# EAGLE board logic_vB (EAGLE 6.4)
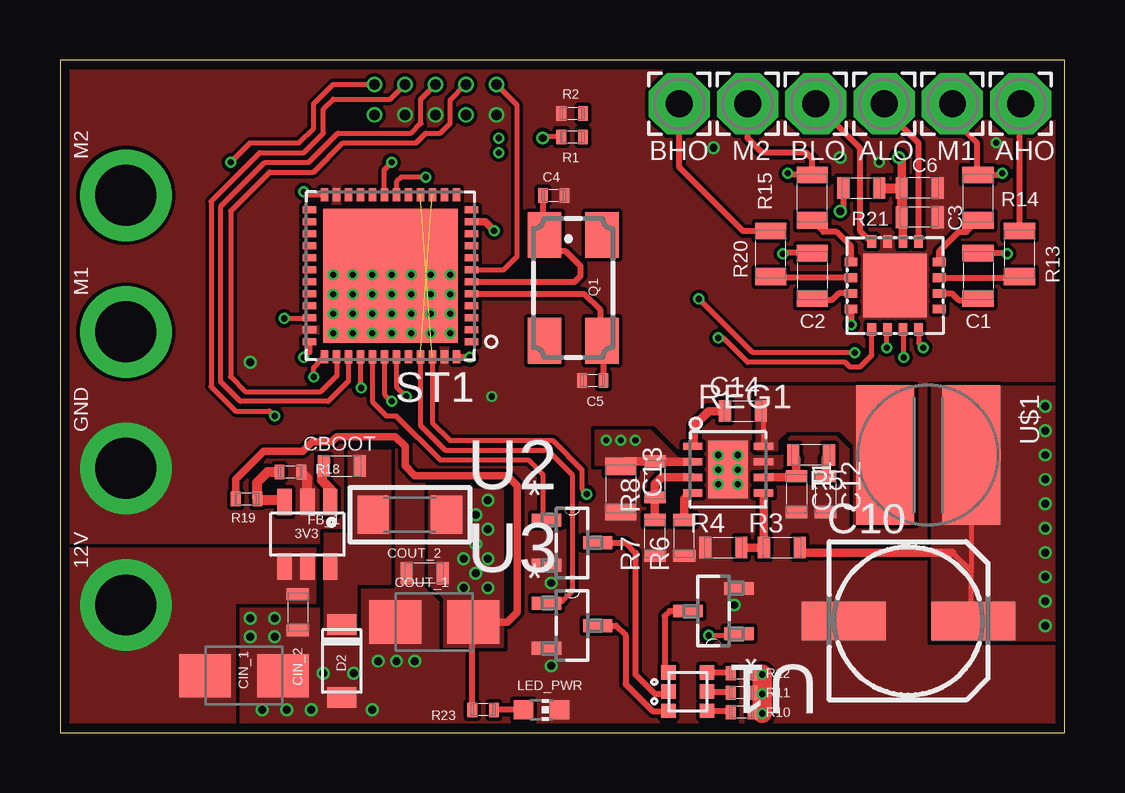
[diagram p0: board, top side]
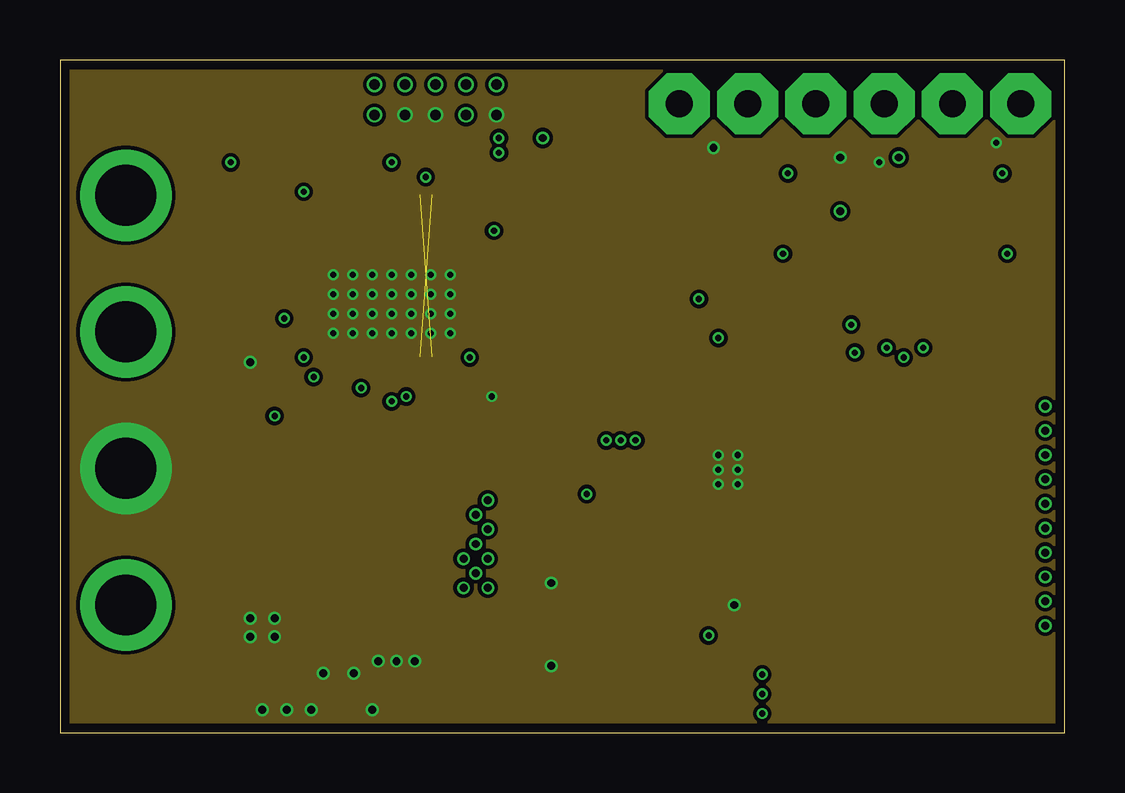
[diagram p1: board, inner layer Route2]
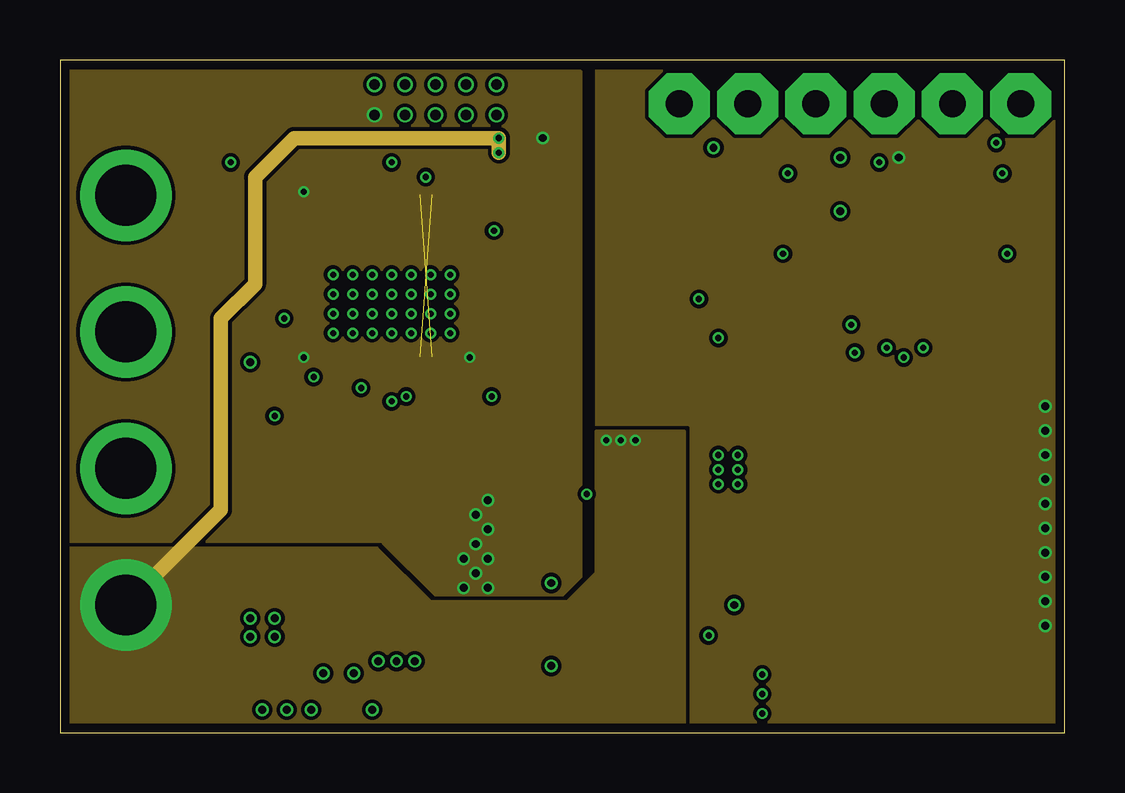
[diagram p2: board, inner layer Route3]
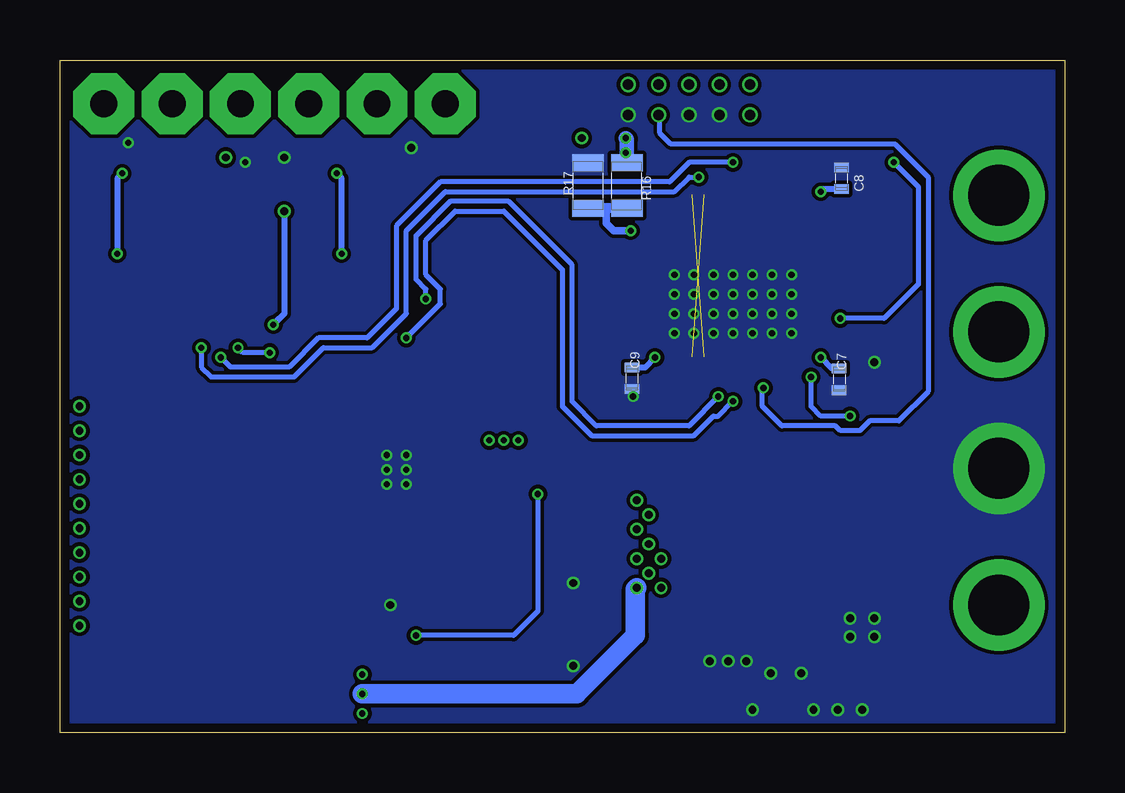
[diagram p3: board, bottom side, seen from below]

Size 41.86 x 28.04 mm. Coordinates in mm from the lower left corner, seen from the top.
Outline: 41.86,0 41.86,28.04 0,28.04 0,0 41.86,0
Copper layers (1*2*3*16): Top 0.035559375mm / dielectric 0.17018125mm / Route2 0.01778125mm / dielectric 47mil / Route3 0.01778125mm / dielectric 0.17018125mm / Bottom 0.035559375mm
Design rules "LaenPCBOrder *": minimum track width 5mil, minimum drill 10mil, track to track 6mil, track to pad 6mil, pad to pad 6mil, via to via 6mil, smd to smd 6mil, copper to edge 15mil, drill to drill 6mil, minimum pad ring 4mil, minimum via ring 4mil, stop-mask expansion 4mil, vias tented up to drill 13mil, thermal gap 10mil

## Footprints (pad centres in the part's own frame; a part is rotated, then mirrored left to right if it is on the bottom)
R-PDSO-G6 = smd 0.6 x 1.1: 1 -0.95,-1.35; 2 0,-1.35; 3 0.95,-1.35; 4 0.95,1.35; 5 0,1.35; 6 -0.95,1.35
2,54/1,1 = drill 1.118 pad 2.54 octagon: 1 0,0
0805L3 = smd 0.7 x 1.3: 1 -0.95,0; 2 0.95,0
0603L3 = smd 0.5 x 0.9: P$1 -0.75,0; P$2 0.75,0
0402L3 = smd 0.4 x 0.6: P$1 -0.45,0; P$2 0.45,0
153CLV-0605 = smd 3.5 x 1.6: + 2.7,0; - -2.7,0
B/3528-21W = smd 2.15 x 1.8: + 1.625,0; - -1.625,0
SC-109B = smd 1.2 x 0.85: 1 0,-1.525; 2 0,1.525
L1206 = smd 1.3 x 1.6: 1 -1.524,0; 2 1.524,0
RGBLED = smd 0.6 x 0.6: AB 0.8,0.8; AG 0.8,-0.8; AR 0.8,0; CB -0.8,0.8; CG -0.8,-0.8; CR -0.8,0
CHIP-LED0603 = smd 0.8 x 0.8: A 0,-0.75; C 0,0.75
QFN44-16LD-PL-2 = smd 0.53 x 0.36: 1 -1.835,0.975; 2 -1.835,0.325; 3 -1.835,-0.325; 4 -1.835,-0.975; 9 1.835,-0.975; 10 1.835,-0.325; 11 1.835,0.325; 12 1.835,0.975 | smd 0.36 x 0.53: 5 -0.975,-1.835; 6 -0.325,-1.835; 7 0.325,-1.835; 8 0.975,-1.835; 13 0.975,1.835; 14 0.325,1.835; 15 -0.325,1.835; 16 -0.975,1.835 | smd 2.65 x 2.65: TP 0,0
CTS406 = smd 1.9 x 1.4: 1 -2.2,-1.2; 2 2.2,-1.2; 3 2.2,1.2; 4 -2.2,1.2
S-PVSON-N8 = smd 0.3 x 0.8: 1 -0.975,-1.475; 2 -0.325,-1.475; 3 0.325,-1.475; 4 0.975,-1.475; 5 0.975,1.475; 6 0.325,1.475; 7 -0.325,1.475; 8 -0.975,1.475 | smd 2.4 x 1.65: P$1 0,0
UFQFPN48 = smd 0.55 x 0.3: 1 -3.375,2.75; 2 -3.375,2.25; 3 -3.375,1.75; 4 -3.375,1.25; 5 -3.375,0.75; 6 -3.375,0.25; 7 -3.375,-0.25; 8 -3.375,-0.75; 9 -3.375,-1.25; 10 -3.375,-1.75; 11 -3.375,-2.25; 12 -3.375,-2.75; 25 3.375,-2.75; 26 3.375,-2.25; 27 3.375,-1.75; 28 3.375,-1.25; 29 3.375,-0.75; 30 3.375,-0.25; 31 3.375,0.25; 32 3.375,0.75; 33 3.375,1.25; 34 3.375,1.75; 35 3.375,2.25; 36 3.375,2.75 | smd 0.3 x 0.55: 13 -2.75,-3.375; 14 -2.25,-3.375; 15 -1.75,-3.375; 16 -1.25,-3.375; 17 -0.75,-3.375; 18 -0.25,-3.375; 19 0.25,-3.375; 20 0.75,-3.375; 21 1.25,-3.375; 22 1.75,-3.375; 23 2.25,-3.375; 24 2.75,-3.375; 37 2.75,3.375; 38 2.25,3.375; 39 1.75,3.375; 40 1.25,3.375; 41 0.75,3.375; 42 0.25,3.375; 43 -0.25,3.375; 44 -0.75,3.375; 45 -1.25,3.375; 46 -1.75,3.375; 47 -2.25,3.375; 48 -2.75,3.375 | smd 5.6 x 5.6: TP 0,0
SOT95P240X97-3N = smd 1.219 x 0.533: 1 -1.067,0.94; 2 -1.067,-0.94; 3 1.067,0
SDR0604 = smd 5.8 x 2.4: 1 0,1.8; 2 0,-1.8

## Placement (x,y rotation side)
3V3  LMR14206  [R-PDSO-G6]  10.31,8.28 180 top
AHO  [2,54/1,1]  40.03,26.21 180 top
ALO  [2,54/1,1]  34.34,26.21 180 top
BHO  [2,54/1,1]  25.81,26.21 180 top
BLO  [2,54/1,1]  31.5,26.21 180 top
C1  10u  [0805L3]  38.25,19.05 270 top
C2  10u  [0805L3]  31.34,19.05 270 top
C3  1u  [0603L3]  35.81,21.49 180 top
C4  20p  [0402L3]  20.57,22.4 0 top
C5  20p  [0402L3]  22.2,14.68 180 top
C6  10u  [0603L3]  35.81,22.71 180 top
C7  100n  [0402L3]  9.4,14.73 270 bottom
C8  100n  [0402L3]  9.3,23.11 90 bottom
C9  100n  [0402L3]  18.03,14.78 270 bottom
C10  [153CLV-0605]  35.36,4.67 0 top
C11  [0603L3]  30.68,9.96 270 top
C12  [0603L3]  31.9,9.96 270 top
C13  [0805L3]  23.37,10.16 270 top
C14  [0603L3]  28.45,13.41 0 top
CBOOT  .15uF  [0603L3]  11.73,11.13 0 top
CIN_1  10uF  [B/3528-21W]  7.67,2.39 180 top
CIN_2  100nF  [0603L3]  9.91,5.03 270 top
COUT_1  47uF  [B/3528-21W]  15.6,4.62 0 top
COUT_2  100nF  [0603L3]  15.19,6.65 180 top
D2  DB2W60400L  [SC-109B]  11.73,3 180 top
FB_1  FB_1206  [L1206]  14.58,9.09 0 top
LED1  LED_RGB3  [RGBLED]  26.16,1.73 0 top
LED_PWR  [CHIP-LED0603]  20.07,0.97 270 top
M1  [2,54/1,1]  37.19,26.21 180 top
M2  [2,54/1,1]  28.65,26.21 180 top
MD1  [QFN44-16LD-PL-2]  34.8,18.64 180 top
Q1  [CTS406]  21.39,18.54 270 top
R1  100  [0402L3]  21.34,24.84 0 top
R2  10K  [0402L3]  21.34,25.81 180 top
R3  [0603L3]  30.07,7.72 0 top
R4  [0603L3]  27.64,7.72 0 top
R5  [0603L3]  31.29,11.58 180 top
R6  [0603L3]  26.01,8.13 90 top
R7  [0603L3]  24.79,8.13 90 top
R8  [0603L3]  24.79,10.57 90 top
R10  330  [0402L3]  28.4,0.86 180 top
R11  1K  [0402L3]  28.4,1.68 180 top
R12  510  [0402L3]  28.4,2.49 180 top
R13  10R  [0805L3]  39.98,19.96 90 top
R14  2R  [0805L3]  38.25,22.3 90 top
R15  2R  [0805L3]  31.34,22.3 90 top
R16  [0805L3]  18.24,22.81 90 bottom
R17  [0805L3]  19.86,22.81 270 bottom
R18  1.02K  [0402L3]  9.6,10.87 180 top
R19  3.4K  [0402L3]  7.77,9.75 0 top
R20  10R  [0805L3]  29.62,19.96 90 top
R21  100K  [0603L3]  33.38,22.71 0 top
R23  330  [0402L3]  17.63,0.97 180 top
REG1  [S-PVSON-N8]  27.84,10.97 270 top
ST1  [UFQFPN48]  13.77,19.05 180 top
U1  BC817-25  [SOT95P240X97-3N]  27.23,5.08 180 top
U2  BC817-25  [SOT95P240X97-3N]  21.34,7.92 0 top
U3  BC817-25  [SOT95P240X97-3N]  21.34,4.47 0 top
U$1  [SDR0604]  36.17,11.58 270 top

## Library data of the parts
3V3 = ti_lmr14206
AHO ALO BHO BLO M1 M2 = wirepad
C1-C9 C11-C14 CBOOT CIN_2 COUT_2 MD1 R1-R8 R10-R21 R23 REG1 ST1 U$1 = common
C10 CIN_1 COUT_1 = rcl
D2 = diode-1
FB_1 = rc-master-smd
LED1 = dp_devices
LED_PWR = adafruit
Q1 = crystal; OC_FARNELL: unknown; OC_NEWARK: unknown
U1-U3 = Fairchild_By_element14_Batch_1; MPN: BC817-25; OC_FARNELL: 1228216; OC_NEWARK: -; PACKAGE: SOT-3; SUPPLIER: Fairchild

## Nets
3V3: 3V3.6 CBOOT.P$2 D2.1 FB_1.1
+12V: 3V3.4 3V3.5 C13.1 CIN_1.+ CIN_2.P$1 R8.P$2 R16.2 REG1.2
AB: LED1.AB R12.P$2
AG: LED1.AG R10.P$2
AHO: AHO.1 R13.2
ALO: ALO.1 MD1.5
AR: LED1.AR R11.P$2
BHO: BHO.1 R20.2
BLO: BLO.1 MD1.8
BOOT: C14.P$1 REG1.1
BOOT0: ST1.44
COMP: C11.P$1 R5.P$2 REG1.6
EN: R7.P$2 R8.P$1 REG1.3
GND: 3V3.2 C3.P$1 C4.P$2 C5.P$2 C6.P$1 C7.P$2 C8.P$2 C9.P$2 C10.- C11.P$2 C12.P$2 C13.2 CIN_1.- CIN_2.P$2 COUT_1.- COUT_2.P$2 D2.2 LED_PWR.C MD1.7 MD1.TP R2.P$2 R4.P$1 R6.P$1 R7.P$1 R17.1 R18.P$1 REG1.7 REG1.P$1 ST1.23 ST1.35 ST1.47 U1.2 U2.2 U3.2
LED_BLUE: ST1.16 ST1.46 U1.1
LED_GREEN: ST1.15 ST1.45 U3.1
LED_RED: ST1.41 U2.1
LIPO_ADC_SIG: R16.1 R17.2 ST1.11
M1: C1.1 M1.1 R14.2
M2: C2.1 M2.1 R15.2
N$3: C1.2 MD1.2
N$4: C2.2 MD1.11
N$7: MD1.3 R13.1
N$9: 3V3.1 CBOOT.P$1
N$14: MD1.4 R14.1
N$15: MD1.9 R15.1
N$17: MD1.10 R20.1
N$20: 3V3.3 R18.P$2 R19.P$2
N$25: LED1.CG U3.3
N$28: LED1.CR U2.3
N$29: LED1.CB U1.3
N$33: C12.P$1 R5.P$1
N$39: LED_PWR.A R23.P$1
N$42: MD1.12 R21.P$1
NRST: ST1.7
OSC_IN: C5.P$1 Q1.3 ST1.5
OSC_OUT: C4.P$1 Q1.1 ST1.6
PA3: ST1.13
PA4: ST1.14
PH: C14.P$2 REG1.8 U$1.2
PWM_1: MD1.16 ST1.18
PWM_2: MD1.15 ST1.19
PWM_3: MD1.13 ST1.42
PWM_4: MD1.14 ST1.43
RST_BTN: R2.P$1
RST_BTN_VDD: R1.P$2
RT: R6.P$2 REG1.4
SPI_MISO: ST1.27
SPI_MOSI: ST1.28
SPI_SCK: ST1.26
TCK: ST1.37
TDI: ST1.38
TDO: ST1.39
TMS: ST1.34
TRST: ST1.40
USB_DM: ST1.32
USB_DP: ST1.33
USB_ID: ST1.31
USB_VBUS: ST1.30
VCC: C3.P$2 C6.P$2 C10.+ MD1.6 R3.P$2 R21.P$2 U$1.1
VDD: C7.P$1 C8.P$1 C9.P$1 COUT_1.+ COUT_2.P$1 FB_1.2 R1.P$1 R10.P$1 R11.P$1 R12.P$1 R19.P$1 R23.P$2 ST1.24 ST1.36 ST1.48
VSENSE: R3.P$1 R4.P$2 REG1.5

## Tracks (layer width: path | path; a pad name or v marks a point on that pad's centre or on a via)
3V3
  pour Top (no thermals): 11.02,8.28 11.02,4.01 12.34,4.01 12.34,6.25 13.77,6.25 13.77,11.73 12.04,11.73 12.04,8.28
+12V  (via drill 0.25, 2.54 pad 3.81)
  Top 0.203: 24.81,11.3 R8.P$2 | 23.57,11.32 C13.1
  Top 0.356: REG1.2 24.81,11.3 | R8.P$2 23.57,11.32
  Route3 0.61: v2.74,5.33 6.71,9.3 6.71,17.27 8.13,18.69 8.13,23.17 9.75,24.79 v18.29,24.79 v18.29,24.18
  Bottom 0.61: R16.2 18.24,24.74 v18.29,24.79
  other vias: 22.76,12.19 23.37,12.19 23.98,12.19
  pour Top (no thermals): 0.36,0.36 0.36,7.67 10.62,7.67 10.62,5.44 7.26,5.44 7.26,0.36
  pour Route3: 0.41,7.72 13.21,7.72 15.44,5.49 21.13,5.49 22.35,6.71 22.35,12.6 26.01,12.6 26.01,0.41 0.41,0.41
  pour Top (no thermals): 26.62,11.18 22.35,11.18 22.35,12.6 24.59,12.6 25.81,11.38 26.62,11.38
AB
  Top 0.254: LED1.AB 27.91,2.53 R12.P$2
AG
  Top 0.254: LED1.AG 27.88,0.93 R10.P$2
AHO
  Top 0.254: R13.2 39.98,26.16 AHO.1
ALO
  Top 0.254: MD1.5 35.77,24.58 34.34,26.01 ALO.1
AR
  Top 0.254: LED1.AR 27.9,1.73 R11.P$2
BHO
  Top 0.254: R20.2 28.46,20.91 25.81,23.57 BHO.1
BLO
  Top 0.254: MD1.8 33.78,20.48 33.32,20.93 33.32,24.38 BLO.1
BOOT
  Top 0.203: 26.42,12 REG1.1
  Top 0.356: C14.P$1 27.03,13.41 26.42,12.8 26.42,12
COMP
  Top 0.203: 30.62,10.65 C11.P$1
  Top 0.356: REG1.6 30.62,10.65 | C11.P$1 30.68,11.44 R5.P$2
EN
  Top 0.356: R7.P$2 R8.P$1 24.79,10.36 25.07,10.65 REG1.3
GND  (via drill 0.25, 0.33, 0.43, 2.54 pad 3.81)
  Top 0.406: 3V3.2 10.31,10.61 R18.P$1
  other vias: 2.74,11.02 18.19,25.76 15.65,25.76 14.38,25.76 7.92,15.44 8.43,0.97 9.45,0.97 10.46,0.97 13,0.97 10.97,2.49 12.24,2.49 13.26,3 14.02,3 14.78,3 7.92,4.78 8.94,4.78 7.92,4.01 8.94,4.01 27.23,24.38 32.51,23.98 27.43,11.58 28.24,11.58 27.43,10.97 28.24,10.97 27.43,10.36 28.24,10.36 11.38,19.1 12.19,19.1 13,19.1 13.82,19.1 14.63,19.1 15.44,19.1 16.26,19.1 11.38,18.29 12.19,18.29 13,18.29 13.82,18.29 14.63,18.29 15.44,18.29 16.26,18.29 11.38,17.48 12.19,17.48 13,17.48 13.82,17.48 14.63,17.48 15.44,17.48 16.26,17.48 11.38,16.66 12.19,16.66 13,16.66 13.82,16.66 14.63,16.66 15.44,16.66 16.26,16.66 34.14,23.77 39.01,24.59 17.98,14.02 20.47,6.25 20.47,2.79 28.09,5.33
  pour Top (rank 6, no thermals): 0.36,0.36 0.36,27.58 41.61,27.58 41.61,0.36
  pour Route2 (rank 6, no thermals): 0.36,0.36 0.36,27.58 41.61,27.58 41.61,0.36
  pour Bottom (rank 6, no thermals): 0.36,0.36 0.36,27.58 41.61,27.58 41.61,0.36
LED_BLUE  (via drill 0.25)  (1 unrouted)
  Top 0.203: ST1.46 15.52,12.93 16.26,12.19 20.52,12.19 21.74,10.97 21.74,10.16 v21.95,9.96 | v27.03,4.06 28.22,4.06 U1.1
  Bottom 0.203: v21.95,9.96 21.95,5.08 22.96,4.06 v27.03,4.06
LED_GREEN  (1 unrouted)
  Top 0.203: ST1.45 15.02,12.82 16.05,11.79 20.32,11.79 21.34,10.77 21.34,5.89 20.93,5.49 20.35,5.49 U3.1
LED_RED
  Top 0.203: ST1.41 13.02,13.81 13.61,13.21 14.02,13.21 15.85,11.38 19.51,11.38 20.12,10.77 20.12,9.02 U2.1
LIPO_ADC_SIG  (via drill 0.25)
  Top 0.305: ST1.11 17.71,21.3 v18.08,20.93
  Bottom 0.305: v18.08,20.93 18.8,20.93 19.1,21.23 19.1,21.86
  Bottom 0.406: R16.1 19.1,21.86 R17.2
M1  (via drill 0.25)
  Top 0.254: C1.1 39.44,20 v39.47,19.96 | v39.27,23.32 39.2,23.25 R14.2 38.2,23.3 38.2,24.59 37.19,25.6 M1.1
  Bottom 0.254: v39.27,23.32 39.47,23.11 v39.47,19.96
M2  (via drill 0.25)
  Top 0.254: v30.33,23.32 30.39,23.25 R15.2 31.34,23.93 31.09,24.18 29.26,24.18 28.65,24.79 M2.1 | C2.1 30.16,20 v30.12,19.96
  Bottom 0.254: v30.12,19.96 30.12,23.11 v30.33,23.32
N$3
  Top 0.254: MD1.2 37.15,18.32 37.44,18.03 38.19,18.03 C1.2
N$4
  Top 0.254: MD1.11 32.44,18.32 32.16,18.03 31.41,18.03 C2.2
N$7
  Top 0.254: MD1.3 39.8,18.97 39.88,19.05 39.94,19.05 R13.1
N$9
  Top 0.406: 3V3.1 11.26,10.18 10.92,10.52 10.92,11.06 CBOOT.P$1
N$14
  Top 0.254: MD1.4 36.63,20.07 37.44,20.88 37.78,20.88 R14.1
N$15
  Top 0.254: MD1.9 32.96,20.28 32.36,20.88 31.82,20.88 R15.1
N$17
  Top 0.254: MD1.10 29.66,18.97 R20.1
N$20
  Top 0.406: R18.P$2 8.64,10.87 8.22,10.46 R19.P$2 8.27,9.7 9.3,9.7 3V3.3
N$24  (via drill 2.54 pad 3.81)
  other vias: 2.74,22.4
N$25
  Top 0.254: U3.3 23.16,4.47 23.57,4.06 23.57,2.03 24.69,0.91 25.35,0.91 LED1.CG
N$27  (via drill 2.54 pad 3.81)
  other vias: 2.74,16.71
N$28
  Top 0.254: U2.3 23.57,7.93 23.98,7.52 23.98,2.44 24.79,1.63 25.26,1.63 LED1.CR
N$29
  Top 0.254: U1.3 25.4,5.08 25.2,4.88 25.2,2.69 LED1.CB
N$33
  Top 0.356: C12.P$1 31.9,11.44 R5.P$1
N$36
  pour Top (no thermals): 35.31,20.27 35.31,23.11 33.78,23.11 33.78,21.29 34.9,21.29 34.9,20.27
N$39
  Top 0.254: LED_PWR.A R23.P$1
N$42  (via drill 0.25, 0.33)
  Top 0.254: MD1.12 v32.96,17.02 v32.97,17.02 | R21.P$1 32.63,21.86 v32.51,21.74
  Bottom 0.254: 32.71,17.27 v32.97,17.02 32.51,17.48 v32.51,21.74
NRST  (via drill 0.43)
  Top 0.203: ST1.7 18.49,19.3 19.05,19.86 19.05,26.16 v18.19,27.03
OSC_IN
  Top 0.254: ST1.5 21.83,18.3 22.5,17.63 22.5,16.42 Q1.3 22.65,16.28 C5.P$1
OSC_OUT
  Top 0.254: ST1.6 21.44,18.8 21.69,19.05 21.69,19.46 21.08,20.07 20.86,20.07 Q1.1 20.12,20.81 C4.P$1
PH
  Top 0.203: REG1.8 29.31,13.3 C14.P$2
  pour Top (no thermals): 29.06,11.79 29.06,14.43 35.56,14.43 35.56,8.74 33.12,8.74 33.12,11.99 32.51,12.6 30.28,12.6 29.87,12.19 29.87,11.79
PWM_1  (via drill 0.25)
  Top 0.203: MD1.16 35.77,16.25 v35.97,16.05 | v15.24,23.17 14.22,23.17 14.02,22.96 ST1.18
  Bottom 0.203: v35.97,16.05 35.97,15.24 35.56,14.83 32.11,14.83 30.89,16.05 28.85,16.05 27.43,17.48 27.43,20.93 25.81,22.56 16.26,22.56 15.65,23.17 v15.24,23.17
PWM_2  (via drill 0.25)
  Top 0.203: ST1.19 13.52,23.47 v13.82,23.77 | v35.15,15.65 35.15,16.78 MD1.15
  Bottom 0.203: v13.82,23.77 15.65,23.77 16.46,22.96 26.01,22.96 27.84,21.13 27.84,17.68 29.06,16.46 31.09,16.46 32.31,15.24 34.75,15.24 v35.15,15.65
PWM_3  (via drill 0.25)
  Top 0.203: MD1.13 33.83,16.8 33.83,15.75 33.32,15.24 32.92,15.24 32.71,15.44 28.65,15.44 27.63,16.46 v27.43,16.46 | ST1.42 13.52,14.12 v13.82,13.82
  Bottom 0.203: v27.43,16.46 26.01,17.88 26.01,18.49 26.62,19.1 26.62,20.52 25.4,21.74 23.37,21.74 20.93,19.3 20.93,13.61 19.71,12.4 15.44,12.4 14.63,13.21 14.43,13.21 v13.82,13.82
PWM_4  (via drill 0.25)
  Top 0.203: ST1.43 14.02,14.43 v14.43,14.02 | v34.44,16.05 34.44,16.78 MD1.14 | v33.12,15.85 28.85,15.85 v26.62,18.09
  Bottom 0.203: v33.12,15.85 34.24,15.85 v34.44,16.05 | v14.43,14.02 15.65,12.8 19.51,12.8 20.52,13.82 20.52,19.51 23.16,22.15 25.6,22.15 27.03,20.73 27.03,18.9 26.62,18.49 v26.62,18.09
RT
  Top 0.203: REG1.4 26.25,10
  Top 0.356: 26.25,10 26.01,9.75 R6.P$2
TCK  (via drill 0.25, 0.43)
  Top 0.203: v10.57,14.83 10.57,15.22 ST1.37 | v8.94,13.21 8.74,13.41 7.31,13.41 6.3,14.43 6.3,22.15 8.33,24.18 10.16,24.18 10.97,24.99 10.97,26.01 11.38,26.42 13.77,26.42 v14.38,27.03
  Bottom 0.203: v8.94,13.21 10.16,13.21 10.57,13.61 v10.57,14.83
TDI  (via drill 0.43)
  Top 0.203: ST1.38 11.53,15.66 11.53,14.88 10.87,14.22 7.72,14.22 7.11,14.83 7.11,21.74 8.74,23.37 10.57,23.37 11.79,24.59 14.83,24.59 15.24,24.99 15.85,24.99 16.26,25.4 16.26,26.37 v16.92,27.03
TDO  (via drill 0.43)
  Top 0.203: 11.99,15.65 ST1.39 12.02,14.66 11.18,13.82 7.52,13.82 6.71,14.63 6.71,21.95 8.53,23.77 10.36,23.77 11.58,24.99 14.63,24.99 15.04,25.4 15.04,26.42 v15.65,27.03
TMS  (via drill 0.25, 0.43)
  Top 0.203: v7.11,23.77 7.92,24.59 9.96,24.59 10.57,25.2 10.57,26.21 11.38,27.03 v13.11,27.03 | v9.35,17.27 10.36,17.27 ST1.34
  Bottom 0.203: v7.11,23.77 6.1,22.76 6.1,18.69 7.52,17.27 v9.35,17.27
TRST  (via drill 0.25, 0.43)
  Top 0.203: ST1.40 12.52,14.41 v12.55,14.38
  Bottom 0.203: v12.55,14.38 12.6,14.33 12.6,13.61 11.79,12.8 9.55,12.8 9.35,12.6 8.53,12.6 8.13,13.01 6.91,13.01 5.69,14.22 5.69,23.17 7.06,24.54 16.41,24.54 16.87,24.99 16.87,25.71 v16.92,25.76
VCC  (via drill 0.33)
  Top 0.203: U$1.1 37.97,6.73 | C10.+ 37.97,4.76 37.97,6.73 | 37.97,6.73 37.19,7.52
  Top 0.356: 37.19,7.52 31.03,7.52 R3.P$2 | MD1.6 35.12,21.43 C3.P$2 | C6.P$2 35.06,23.86 v34.95,23.98
  Top 0.406: R21.P$2 C6.P$2 C3.P$2
  other vias: 41.05,4.47 41.05,5.49 41.05,6.5 41.05,7.52 41.05,8.53 41.05,9.55 41.05,10.57 41.05,11.58 41.05,12.6 41.05,13.61
  pour Route3 (rank 6): 41.66,27.64 22.35,27.64 22.35,0.41 41.66,0.41
  pour Top (no thermals): 36.37,3.86 36.37,14.43 41.66,14.43 41.66,3.86
VDD  (via drill 0.25, 0.33, 0.43)
  Top 0.203: R1.P$1 20.17,24.84 v20.12,24.79 | 17.18,4.58 COUT_1.+
  Top 0.254: ST1.24 10.29,22.43 v10.16,22.56 | ST1.36 10.39,15.88 v10.16,15.65 | ST1.48 17.04,15.68 v17.07,15.65 | R23.P$2 17.18,4.58 | R12.P$1 29.21,2.49 v29.26,2.44 | R11.P$1 29.21,1.68 v29.26,1.63 | v29.26,0.81 28.9,0.81 R10.P$1
  Top 0.305: R19.P$1 7.32,10.57 8.48,11.74 10.11,11.74 10.52,12.14 11.33,12.14 11.53,12.34 13.97,12.34 14.38,11.94 14.38,11.13 14.78,10.72 18.64,10.72 19.05,10.31 19.05,5.03 18.64,4.62 COUT_1.+
  Top 0.813: v29.26,0.81 v29.26,1.63 v29.26,2.44
  Bottom 0.254: C8.P$1 10.05,22.66 v10.16,22.56 | C7.P$1 9.7,15.18 v10.16,15.65 | C9.P$1 17.48,15.23 v17.07,15.65
  Bottom 0.813: v29.26,1.63 20.32,1.63 17.88,4.06 17.88,5.99 v17.83,6.05
  other vias: 13.11,25.76 16.81,6.05 17.32,6.65 17.83,7.26 16.81,7.26 17.32,7.87 17.83,8.48 17.32,9.09 17.83,9.7
  pour Top (no thermals): 15.39,10.11 15.39,6.25 16,5.64 16,3.61 18.44,3.61 18.44,10.11
  pour Route3 (rank 6, no thermals): 0.36,0.36 0.36,27.58 21.69,27.58 21.69,0.36
VSENSE
  Top 0.203: REG1.5
  Top 0.356: R4.P$2 R3.P$1 REG1.5

## Text on the board
tPlace: M2 | M1 | GND | 12V
Document: Layer Info | TOP: GND | RT2 : GND | RT3: +12V | BTM: GND